# EAGLE board ruido_v4 (EAGLE 5.06)
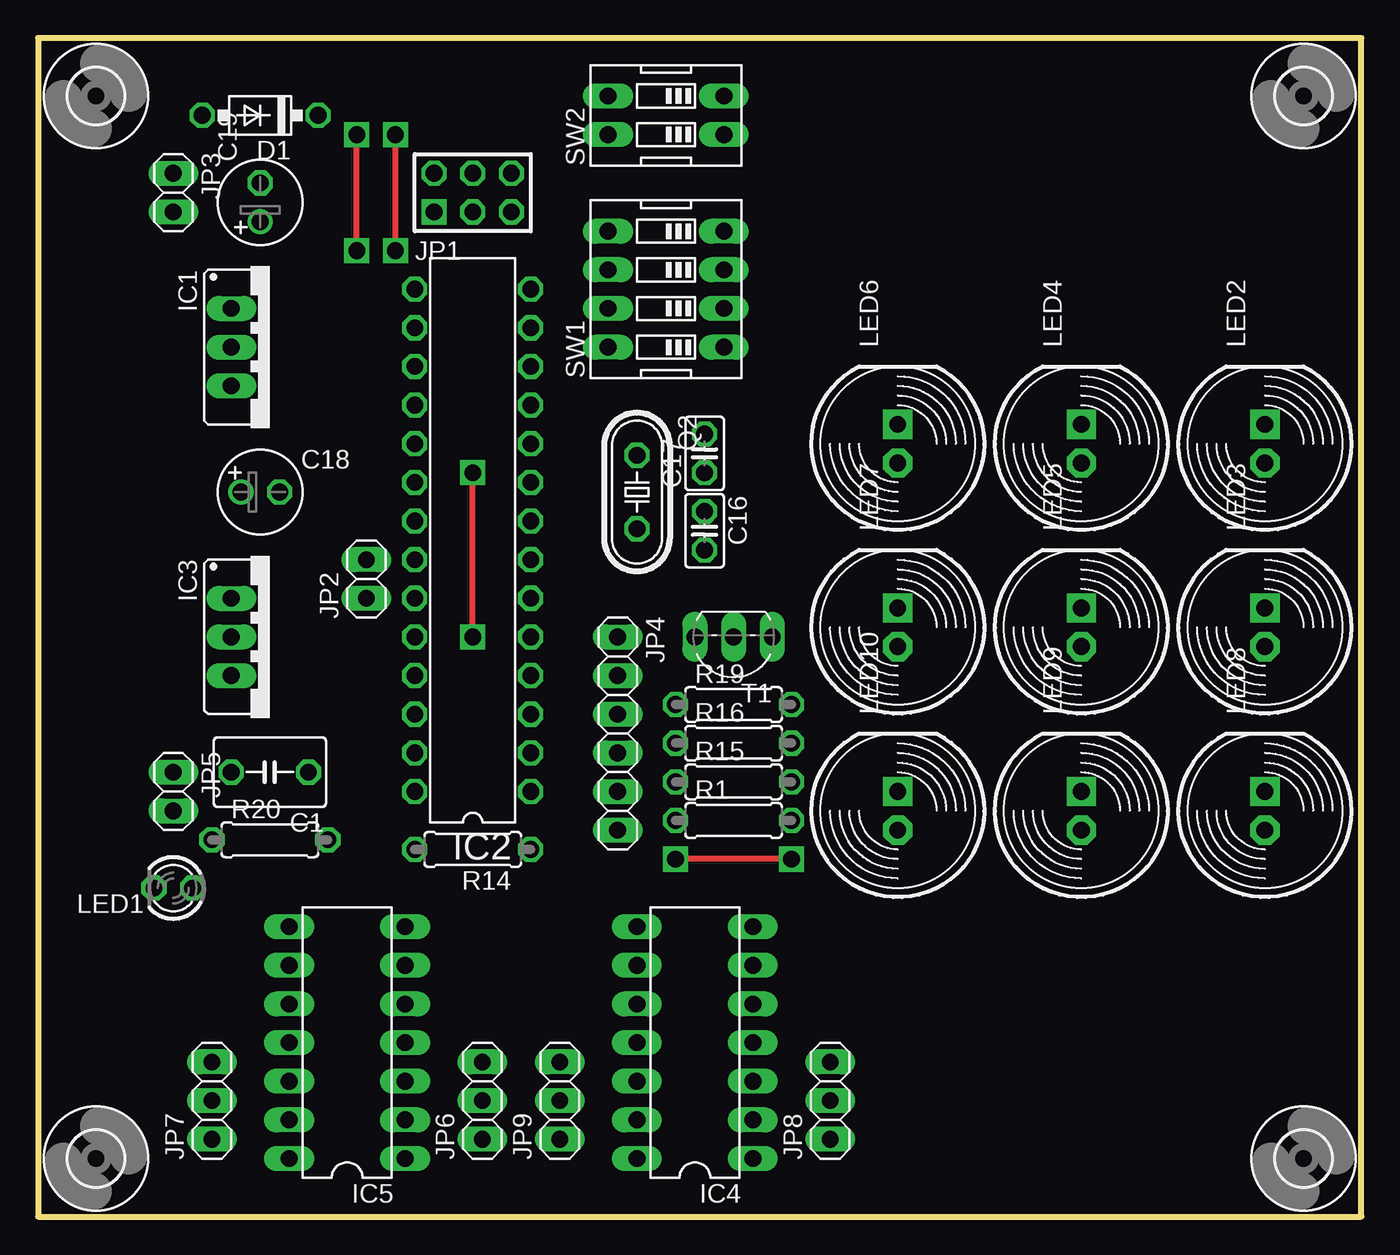
[diagram p0: board, top side]
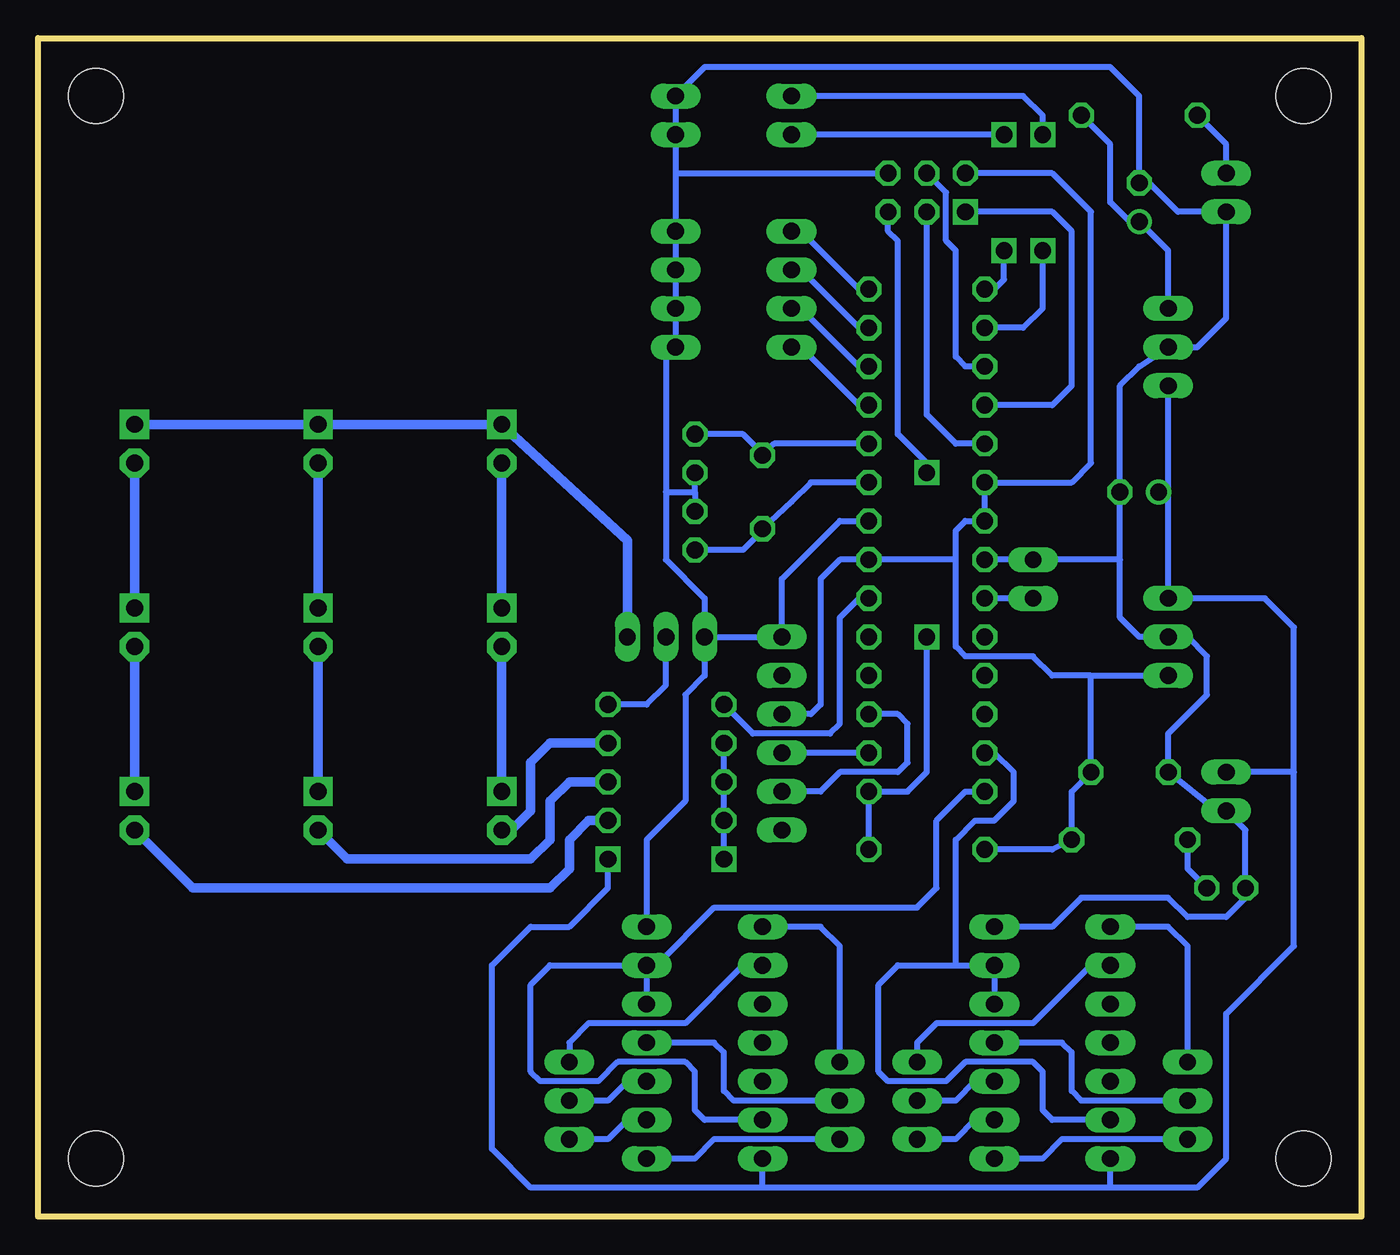
[diagram p1: board, bottom side, seen from below]

Size 87 x 77.47 mm. Coordinates in mm from the lower left corner, seen from the top.
Outline: 0,0 87,0 87,77.47 0,77.47 0,0
Copper layers (1*16): Top 0.035mm / dielectric 1.5mm / Bottom 0.035mm
Design rules "default": minimum track width 10mil, minimum drill 24mil, track to track 8mil, track to pad 8mil, pad to pad 8mil, via to via 8mil, smd to smd 8mil, copper to edge 40mil, drill to drill 8mil, minimum pad ring 10mil, minimum via ring 8mil, stop-mask expansion 4mil, vias tented up to drill 0mil, thermal gap 10mil

## Footprints (pad centres in the part's own frame; a part is rotated, then mirrored left to right if it is on the bottom)
C050-045X075 = drill 1.1 octagon: 1 -2.54,0; 2 2.54,0
C025-025X050 = drill 1.1 octagon: 1 -1.27,0; 2 1.27,0
E2,5-6 = drill 1.1 round: + -1.27,0 | drill 1.1 pad 1.6 octagon: - 1.27,0
DO41-7 = drill 1.1 octagon: A 3.81,0; C -3.81,0
78XXS = drill 1.1 long: GND 0,-2.54; IN -2.54,-2.54; OUT 2.54,-2.54
DIL28-3 = drill 1.1 octagon: 1 -16.51,-3.81; 2 -13.97,-3.81; 3 -11.43,-3.81; 4 -8.89,-3.81; 5 -6.35,-3.81; 6 -3.81,-3.81; 7 -1.27,-3.81; 8 1.27,-3.81; 9 3.81,-3.81; 10 6.35,-3.81; 11 8.89,-3.81; 12 11.43,-3.81; 13 13.97,-3.81; 14 16.51,-3.81; 15 16.51,3.81; 16 13.97,3.81; 17 11.43,3.81; 18 8.89,3.81; 19 6.35,3.81; 20 3.81,3.81; 21 1.27,3.81; 22 -1.27,3.81; 23 -3.81,3.81; 24 -6.35,3.81; 25 -8.89,3.81; 26 -11.43,3.81; 27 -13.97,3.81; 28 -16.51,3.81
DIL14 = drill 1.1 long: 1 -7.62,-3.81; 2 -5.08,-3.81; 3 -2.54,-3.81; 4 0,-3.81; 5 2.54,-3.81; 6 5.08,-3.81; 7 7.62,-3.81; 8 7.62,3.81; 9 5.08,3.81; 10 2.54,3.81; 11 0,3.81; 12 -2.54,3.81; 13 -5.08,3.81; 14 -7.62,3.81
AVR-ISP-6 = drill 1.1 square: 1 -2.54,-1.27 | drill 1.1 octagon: 2 -2.54,1.27; 3 0,-1.27; 4 0,1.27; 5 2.54,-1.27; 6 2.54,1.27
1X02 = drill 1.1 long: 1 -1.27,0; 2 1.27,0
1X06 = drill 1.1 long: 1 -6.35,0; 2 -3.81,0; 3 -1.27,0; 4 1.27,0; 5 3.81,0; 6 6.35,0
1X03 = drill 1.1 long: 1 -2.54,0; 2 0,0; 3 2.54,0
LED3MM = drill 1.1 octagon: A -1.27,0; K 1.27,0
LED10MM = drill 1.1 pad 1.93 octagon: A -1.27,0 | drill 1.1 pad 1.93 square: K 1.27,0
HC49/S = drill 1.1 octagon: 1 -2.413,0; 2 2.413,0
0207/7 = drill 1.1 octagon: 1 -3.81,0; 2 3.81,0
EDG-04 = drill 1.1 long: 1 -3.81,-3.81; 2 -1.27,-3.81; 3 1.27,-3.81; 4 3.81,-3.81; 5 3.81,3.81; 6 1.27,3.81; 7 -1.27,3.81; 8 -3.81,3.81
EDG-02 = drill 1.1 long: 1 -1.27,-3.81; 2 1.27,-3.81; 3 1.27,3.81; 4 -1.27,3.81
TO92- = drill 1.1 long: 1 2.54,0; 2 0,0; 3 -2.54,0
3,6 = hole 3.6: 0,0

## Placement (x,y rotation side)
C1  100nF  [C050-045X075]  15.24,29.21 180 top
C16  0.1uF  [C025-025X050]  43.81,45.09 270 top
C17  0.1uF  [C025-025X050]  43.81,50.16 90 top
C18  220uF/16V  [E2,5-6]  14.61,47.62 0 top
C19  220uF/16V  [E2,5-6]  14.61,66.67 90 top
D1  1N4001  [DO41-7]  14.61,72.39 180 top
IC1  7809  [78XXS]  15.24,57.15 270 top
IC2  MEGA8-P  [DIL28-3]  28.57,44.45 90 top
IC3  7805  [78XXS]  15.24,38.1 270 top
IC4  4016N  [DIL14]  43.18,11.43 90 top
IC5  4016N  [DIL14]  20.32,11.43 90 top
JP1  AVR-ISP-6  [AVR-ISP-6]  28.57,67.31 0 top
JP2  [1X02]  21.59,41.91 90 top
JP3  [1X02]  8.89,67.31 270 top
JP4  [1X06]  38.1,31.75 270 top
JP5  [1X02]  8.89,27.94 270 top
JP6  [1X03]  29.21,7.62 90 top
JP7  [1X03]  11.43,7.62 90 top
JP8  [1X03]  52.07,7.62 90 top
JP9  [1X03]  34.29,7.62 90 top
LED1  [LED3MM]  8.89,21.59 180 top
LED2  [LED10MM]  80.64,50.8 90 top
LED3  [LED10MM]  80.64,38.73 90 top
LED4  [LED10MM]  68.58,50.8 90 top
LED5  [LED10MM]  68.58,38.73 90 top
LED6  [LED10MM]  56.52,50.8 90 top
LED7  [LED10MM]  56.52,38.73 90 top
LED8  [LED10MM]  80.64,26.67 90 top
LED9  [LED10MM]  68.58,26.67 90 top
LED10  [LED10MM]  56.52,26.67 90 top
Q2  [HC49/S]  39.37,47.62 270 top
R1  470  [0207/7]  45.72,26.04 0 top
R14  10 K  [0207/7]  28.57,24.13 180 top
R15  470  [0207/7]  45.72,28.57 0 top
R16  470  [0207/7]  45.72,31.11 0 top
R19  1k  [0207/7]  45.72,33.66 0 top
R20  1 K  [0207/7]  15.24,24.77 0 top
SW1  [EDG-04]  41.27,60.96 90 top
SW2  [EDG-02]  41.27,72.39 90 top
T1  BC547  [TO92-]  45.72,38.1 180 top
U$2  [3,6]  3.81,3.81 0 top
U$3  [3,6]  83.19,3.81 0 top
U$4  [3,6]  83.19,73.66 0 top
U$5  [3,6]  3.81,73.66 0 top

## Library data of the parts
C1 C16-C19 D1 IC1-IC5 JP1-JP9 LED1-LED10 Q2 R1 R14-R16 R19 R20 SW1 SW2 T1 U$2-U$5 = ruido

## Nets
+5V: C1.1 IC2.7 IC2.20 IC2.21 IC3.OUT JP1.2 JP4.3 R14.2 R20.2
+12V: C18.+ IC1.OUT IC3.IN IC4.14 IC5.14 JP5.1 R1.1 R15.1 R16.1
GND: C1.2 C16.1 C17.1 C18.- C19.- IC1.GND IC2.8 IC2.22 IC3.GND IC4.7 IC5.7 JP1.6 JP2.2 JP3.2 JP4.1 JP5.2 LED1.K SW1.1 SW1.2 SW1.3 SW1.4 SW2.1 SW2.2 T1.1
MISO: IC2.18 JP1.1
MOSI: IC2.17 JP1.4
N$1: C19.+ D1.C IC1.IN
N$2: LED2.A LED3.K
N$3: LED3.A LED8.K
N$4: LED2.K LED4.K LED6.K T1.3
N$5: IC2.15 SW2.4
N$6: IC2.16 SW2.3
N$7: IC2.27 IC5.5 IC5.6 IC5.13
N$8: IC5.9 JP6.3
N$9: IC2.28 IC4.5 IC4.6 IC4.13
N$10: IC5.1 JP7.1
N$11: R19.2 T1.2
N$12: IC5.4 JP7.2
N$13: IC5.8 JP7.3
N$14: IC5.2 JP6.1
N$15: IC2.14 SW1.5
N$16: IC5.3 JP6.2
N$17: IC4.1 JP9.1
N$18: C16.2 IC2.9 Q2.2
N$19: C17.2 IC2.10 Q2.1
N$20: LED6.A LED7.K
N$21: LED4.A LED5.K
N$22: IC2.13 SW1.6
N$23: IC2.12 SW1.7
N$24: IC2.11 SW1.8
N$25: LED5.A LED9.K
N$26: LED7.A LED10.K
N$27: IC4.4 JP9.2
N$28: IC4.8 JP9.3
N$29: IC4.2 JP8.1
N$30: LED1.A R20.1
N$31: IC4.3 JP8.2
N$32: IC4.9 JP8.3
N$33: LED8.A R1.2
N$34: LED9.A R15.2
N$35: LED10.A R16.2
N$37: D1.A JP3.1
PWM: IC2.6 R19.1
RST: IC2.1 JP1.5 R14.1
RXD: IC2.2 JP4.4
SCK: IC2.19 JP1.3
SIG: IC2.23 JP2.1
TXD: IC2.3 JP4.5

## Tracks (layer width: path | path; a pad name or v marks a point on that pad's centre or on a via)
+5V
  Bottom 0.406: JP4.3 36.2,33.02 35.56,33.66 35.56,41.91 34.29,43.18 IC2.7 26.67,43.18 | JP1.2 20.32,68.58 17.78,66.04 17.78,49.53 19.05,48.26 IC2.20 IC2.21 26.04,45.72 26.67,45.09 26.67,43.18 | 26.67,43.18 26.67,37.47 26.04,36.83 21.59,36.83 20.32,35.56 17.78,35.56 | R14.2 20.32,24.13 R20.2 19.05,27.94 C1.1 17.78,35.56 | 17.78,35.56 IC3.OUT
+12V  (via drill 1.1)
  Top 0.406: v49.53,23.5 v41.91,23.5
  Bottom 0.406: 4.45,29.21 4.45,38.73 6.35,40.64 IC3.IN 12.7,47.62 | 4.45,29.21 JP5.1 | 12.7,47.62 IC1.OUT | 12.7,47.62 C18.+ | R16.1 R15.1 R1.1 v41.91,23.5 | 16.51,1.91 10.79,1.91 8.89,3.81 8.89,13.34 4.45,17.78 4.45,29.21 | 16.51,1.91 IC5.14 | 16.51,1.91 39.37,1.91 | 39.37,1.91 IC4.14 | v49.53,23.5 49.53,21.59 52.07,19.05 54.61,19.05 57.15,16.51 57.15,4.45 54.61,1.91 39.37,1.91
GND
  Bottom 0.406: IC2.22 JP2.2 15.88,43.18 | T1.1 43.18,40.64 45.72,43.18 45.72,47.62 | 45.72,47.62 43.81,47.62 | 43.81,47.62 C16.1 | 43.81,47.62 C17.1 | 45.72,47.62 45.72,56.52 SW1.1 SW1.2 SW1.3 SW1.4 45.09,68.58 | 45.09,68.58 SW2.1 SW2.2 43.18,75.56 16.51,75.56 14.61,73.66 C19.- 13.97,67.94 12.06,66.04 JP3.2 8.89,59.05 10.79,57.15 IC1.GND 14.61,55.88 15.88,54.61 C18.- 15.88,43.18 | IC2.8 34.29,45.72 38.1,41.91 JP4.1 T1.1 | IC4.7 46.99,24.77 44.45,27.3 44.45,34.29 43.18,35.56 T1.1 | 45.09,68.58 JP1.6 | 15.88,43.18 15.88,39.37 14.61,38.1 IC3.GND 11.43,38.1 10.16,36.83 10.16,34.29 12.7,31.75 C1.2 9.53,26.67 JP5.2 7.62,25.4 LED1.K 7.62,20.95 8.89,19.68 11.43,19.68 12.7,20.95 18.41,20.95 20.32,19.05 IC5.7
MISO
  Bottom 0.406: JP1.1 20.32,66.04 19.05,64.77 19.05,54.61 20.32,53.34 IC2.18
MOSI
  Bottom 0.406: JP1.4 27.3,67.31 27.3,64.14 26.67,63.5 26.67,56.52 26.04,55.88 IC2.17
N$1
  Bottom 0.406: IC1.IN 12.7,63.5 C19.+ 15.24,65.41 16.51,66.67 16.51,70.48 D1.C
N$2
  Bottom 0.61: LED3.K LED2.A
N$3
  Bottom 0.61: LED8.K LED3.A
N$4
  Bottom 0.61: T1.3 48.26,44.45 LED6.K LED4.K LED2.K
N$5  (via drill 1.1)
  Top 0.406: v23.5,63.5 v23.5,71.12
  Bottom 0.406: v23.5,71.12 SW2.4 | v23.5,63.5 23.5,61.59 24.13,60.96 IC2.15
N$6  (via drill 1.1)
  Top 0.406: v20.95,63.5 v20.95,71.12
  Bottom 0.406: v20.95,71.12 20.95,72.39 22.23,73.66 SW2.3 | v20.95,63.5 20.95,59.69 22.23,58.42 IC2.16
N$7
  Bottom 0.406: IC5.5 IC5.6 26.67,16.51 | IC5.13 20.32,6.35 20.95,6.99 20.95,9.53 21.59,10.16 26.04,10.16 27.3,8.89 31.11,8.89 31.75,9.53 31.75,15.24 30.48,16.51 26.67,16.51 | IC2.27 24.13,30.48 22.86,29.21 22.86,27.3 24.13,26.04 25.4,26.04 26.67,24.77 26.67,16.51
N$8
  Bottom 0.406: JP6.3 29.21,11.43 27.94,12.7 21.59,12.7 17.78,16.51 IC5.9
N$9
  Bottom 0.406: IC4.13 43.18,6.35 43.81,6.99 43.81,9.53 44.45,10.16 48.9,10.16 50.16,8.89 53.98,8.89 54.61,9.53 54.61,15.24 53.34,16.51 IC4.6 | IC4.6 IC4.5 | IC2.28 26.04,27.94 27.94,26.04 27.94,21.59 29.21,20.32 42.55,20.32 46.35,16.51 IC4.6
N$10
  Bottom 0.406: JP7.1 19.68,5.08 20.95,3.81 IC5.1
N$11
  Bottom 0.406: T1.2 45.72,34.92 46.99,33.66 R19.2
N$12
  Bottom 0.406: JP7.2 18.41,7.62 19.05,8.26 19.05,10.79 19.68,11.43 IC5.4
N$13
  Bottom 0.406: JP7.3 11.43,17.78 12.7,19.05 IC5.8
N$14
  Bottom 0.406: IC5.2 25.4,6.35 26.67,5.08 JP6.1
N$15
  Bottom 0.406: IC2.14 33.02,60.96 36.83,64.77 SW1.5
N$16
  Bottom 0.406: IC5.3 25.4,8.89 26.67,7.62 JP6.2
N$17
  Bottom 0.406: JP9.1 42.55,5.08 43.81,3.81 IC4.1
N$18
  Bottom 0.406: C16.2 40.64,43.81 39.37,45.09 Q2.2 37.47,46.99 36.2,48.26 IC2.9
N$19
  Bottom 0.406: IC2.10 38.61,50.8 Q2.1 39.37,50.16 40.64,51.44 C17.2
N$20
  Bottom 0.61: LED7.K LED6.A
N$21
  Bottom 0.61: LED5.K LED4.A
N$22
  Bottom 0.406: IC2.13 33.02,58.42 36.83,62.23 SW1.6
N$23
  Bottom 0.406: IC2.12 33.02,55.88 36.83,59.69 SW1.7
N$24
  Bottom 0.406: IC2.11 33.02,53.34 36.83,57.15 SW1.8
N$25
  Bottom 0.61: LED9.K LED5.A
N$26
  Bottom 0.61: LED10.K LED7.A
N$27
  Bottom 0.406: JP9.2 41.27,7.62 41.91,8.26 41.91,10.79 42.55,11.43 IC4.4
N$28
  Bottom 0.406: JP9.3 34.29,17.78 35.56,19.05 IC4.8
N$29
  Bottom 0.406: IC4.2 48.26,6.35 49.53,5.08 JP8.1
N$30
  Bottom 0.406: R20.1 11.43,22.86 LED1.A
N$31
  Bottom 0.406: IC4.3 48.26,8.89 49.53,7.62 JP8.2
N$32
  Bottom 0.406: JP8.3 52.07,11.43 50.8,12.7 44.45,12.7 40.64,16.51 IC4.9
N$33
  Bottom 0.61: R1.2 50.8,26.04 52.07,24.77 52.07,22.86 53.34,21.59 76.83,21.59 LED8.A
N$34
  Bottom 0.61: LED9.A 66.67,23.5 54.61,23.5 53.34,24.77 53.34,27.3 52.07,28.57 R15.2
N$35
  Bottom 0.61: LED10.A 55.88,25.4 54.61,26.67 54.61,29.84 53.34,31.11 R16.2
N$37
  Bottom 0.406: JP3.1 8.89,70.48 D1.A
PWM
  Bottom 0.406: IC2.6 33.02,40.64 34.29,39.37 34.29,32.38 34.92,31.75 40.01,31.75 R19.1
RST  (via drill 1.1)
  Top 0.406: v28.57,38.1 v28.57,48.9
  Bottom 0.406: R14.1 IC2.1 29.84,27.94 28.57,29.21 v28.57,38.1 | JP1.5 31.11,64.77 30.48,64.14 30.48,51.44 28.57,49.53 v28.57,48.9
RXD
  Bottom 0.406: IC2.2 JP4.4
SCK
  Bottom 0.406: JP1.3 28.57,52.7 26.67,50.8 IC2.19
SIG
  Bottom 0.406: JP2.1 IC2.23
TXD
  Bottom 0.406: IC2.3 30.48,33.02 29.84,32.38 29.84,29.84 30.48,29.21 34.29,29.21 35.56,27.94 JP4.5